# EAGLE board Soil Params (EAGLE 9.7.0)

Size 176.82 x 160.39 mm. Coordinates in mm from the lower left corner, seen from the top.
Outline: 0,0 176.82,0 176.82,160.39 0,160.39 0,0
Copper layers (1*16): Top 0.035mm / dielectric 1.5mm / Bottom 0.035mm
Design rules "default": minimum track width 6mil, minimum drill 0.35mm, track to track 6mil, track to pad 6mil, pad to pad 6mil, via to via 6mil, smd to smd 6mil, copper to edge 40mil, drill to drill 6mil, minimum pad ring 10mil, minimum via ring 8mil, stop-mask expansion 4mil, vias tented up to drill 0mil, thermal gap 10mil

## Footprints (pad centres in the part's own frame; a part is rotated, then mirrored left to right if it is on the bottom)
SENRD254W50D503H320B = drill 0.7 pad 1.3: 1 -1.27,0; 2 1.27,0
RESAD1016W63L850D250B = drill 0.83 pad 1.43: 1 -5.08,0; 2 5.08,0
SEN-13322 = drill 1.016 long: 1 -2.54,0; 2 0,0; 3 2.54,0
TO92 = drill 0.813 octagon: 1 -1.27,0; 2 0,1.905; 3 1.27,0
ARDUINO-UNO-R3-SHIELD = drill 1.016 pad 1.88: 3.3V 24.13,-2.54; 5V 24.13,0; A0 24.13,12.7; A1 24.13,15.24; A2 24.13,17.78; A3 24.13,20.32; A4 24.13,22.86; A5 24.13,25.4; AREF -24.13,-13.97; D2 -24.13,20.32; D3 -24.13,17.78; D4 -24.13,15.24; D5 -24.13,12.7; D6 -24.13,10.16; D7 -24.13,7.62; D8 -24.13,3.81; D9 -24.13,1.27; D10 -24.13,-1.27; D11 -24.13,-3.81; D12 -24.13,-6.35; D13 -24.13,-8.89; GND@0 24.13,2.54; GND@1 24.13,5.08; GND@2 -24.13,-11.43; IOREF 24.13,-7.62; NC 24.13,-10.16; RES 24.13,-5.08; RX -24.13,25.4; SCL -24.13,-19.05; SDA -24.13,-16.51; TX -24.13,22.86; VIN 24.13,7.62
LCD-I2C = drill 1.016 long: 1 -19.05,-5.08; 2 -19.05,-7.62; 3 -19.05,-10.16; 4 -19.05,-12.7
1X08 = drill 1.016 long: 1 -8.89,0; 2 -6.35,0; 3 -3.81,0; 4 -1.27,0; 5 1.27,0; 6 3.81,0; 7 6.35,0; 8 8.89,0

## Placement (x,y rotation side)
Q1  PHOTOTRANSISTOR  [SENRD254W50D503H320B]  102.03,77.44 180 top
R1  1k  [RESAD1016W63L850D250B]  100.76,72.36 90 top
SEN1  SEN-13322  [SEN-13322]  103.5,55.22 0 top
U1  TMP36GT9Z_TO92  [TO92]  124.64,6.1 180 top
U2  ARDUINO-UNO-R3-SHIELD  [ARDUINO-UNO-R3-SHIELD]  47.88,100.44 270 top
U3  LCD-16X2-I2CSUNFOUNDER-IIC  [LCD-I2C]  121.19,142.33 0 top
U4  PINHD-1X08_1X08M  [1X08]  25.1,154.04 180 top

## Library data of the parts
Q1 R1 SEN1 U1-U4 = Tinkercad

## Nets
U2_3.3V: U2.3.3V U4.1 U4.5
U2_5V: Q1.1 SEN1.1 U1.3 U2.5V U3.2
U2_A0: SEN1.3 U2.A0
U2_A1: U1.2 U2.A1
U2_A2: Q1.2 R1.2 U2.A2
U2_GND: R1.1 SEN1.2 U1.1 U2.GND@0 U2.GND@1 U2.GND@2 U3.1 U4.2
U2_SCL: U2.SCL U3.4
U2_SDA: U2.SDA U3.3
U4_3: U2.D2 U4.3
U4_8: U2.D3 U4.8

## Tracks (layer width: path | path; a pad name or v marks a point on that pad's centre or on a via)
U2_3.3V  (2 unrouted)
U2_5V  (4 unrouted)
U2_A0  (1 unrouted)
U2_A1  (1 unrouted)
U2_A2  (2 unrouted)
U2_GND  (7 unrouted)
U2_SCL  (1 unrouted)
U2_SDA  (1 unrouted)
U4_3  (1 unrouted)
U4_8  (1 unrouted)